# EAGLE board schematicamitfix_layout3 (EAGLE 8.6.1)
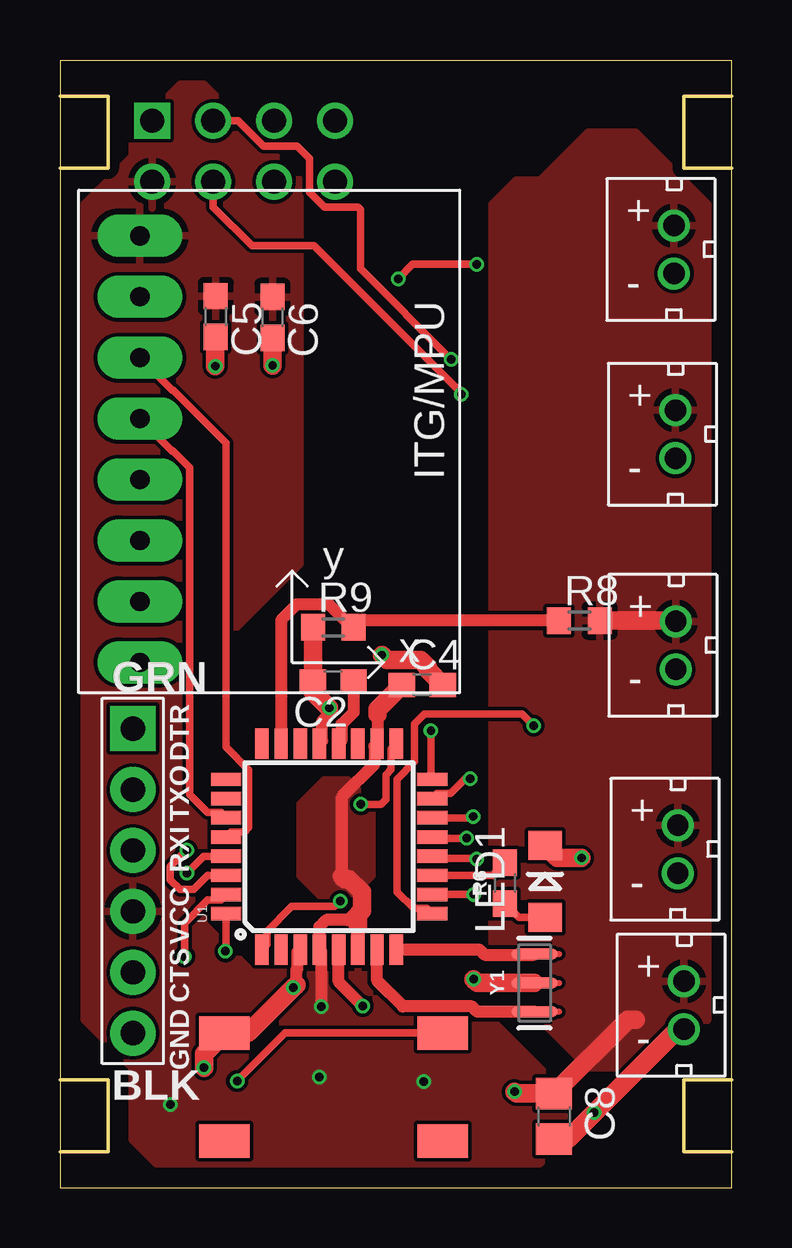
[diagram p0: board, top side]
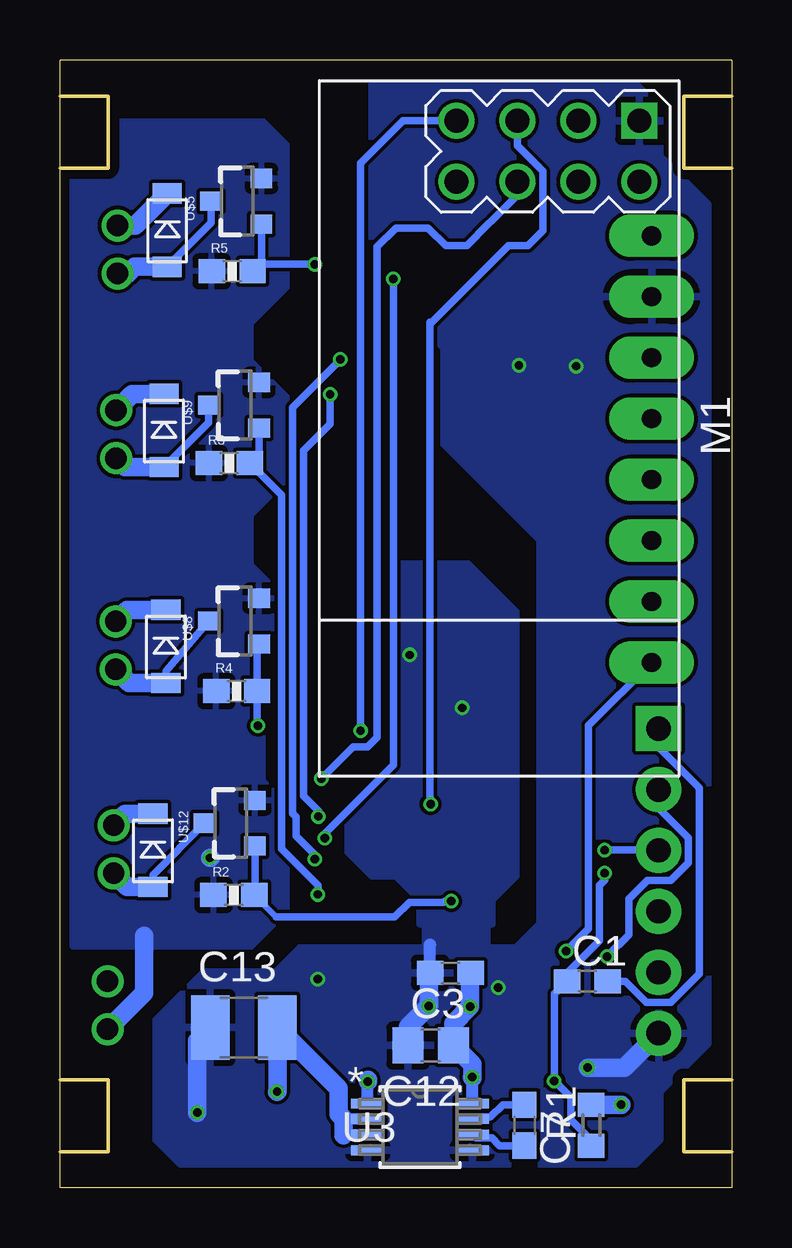
[diagram p1: board, bottom side, seen from below]

Size 28 x 47 mm. Coordinates in mm from the lower left corner, seen from the top.
Outline: 28,1.5 28,0 0,0 0,1.5
Outline: 28,1.5 28,4.5
Outline: 28,4.5 28,42.5
Outline: 28,42.5 28,45.5
Outline: 28,45.5 28,47 0,47 0,45.5
Outline: 0,45.5 0,42.5
Outline: 0,42.5 0,4.5
Outline: 0,4.5 0,1.5
Outline: 28,45.5 26,45.5 26,42.5 28,42.5
Outline: 28,1.5 26,1.5 26,4.5 28,4.5
Outline: 0,1.5 2,1.5 2,4.5 0,4.5
Outline: 0,45.5 2,45.5 2,42.5 0,42.5
Copper layers (1*16): Top 0.035559375mm / dielectric 1.6mm / Bottom 0.035559375mm
Design rules "oshpark-2layer-1": minimum track width 6mil, minimum drill 10mil, track to track 6mil, track to pad 6mil, pad to pad 6mil, via to via 6mil, smd to smd 6mil, copper to edge 15mil, drill to drill 6mil, minimum pad ring 5mil, minimum via ring 5mil, stop-mask expansion 2.5mil, vias tented up to drill 0mil, thermal gap 10mil

## Footprints (pad centres in the part's own frame; a part is rotated, then mirrored left to right if it is on the bottom)
C0603 = smd 1.1 x 1: 1 -0.85,0; 2 0.85,0
C0805 = smd 1.3 x 1.5: 1 -0.95,0; 2 0.95,0
C1210 = smd 1.6 x 2.7: 1 -1.4,0; 2 1.4,0
FTDI_DEVICE_SIDE = drill 1.016 pad 1.88 square: P$1 -6.35,0 | drill 1.016 pad 1.88: P$2 -3.81,0; P$3 -1.27,0; P$4 1.27,0; P$5 3.81,0; P$6 6.35,0
LED-1206 = smd 1.2 x 1.4: A -1.5,0; C 1.5,0
WIRELESS-NRF24L01 = drill 1 square: 1 -12.7,6.35 | drill 1: 2 -10.16,6.35; 3 -12.7,3.81; 4 -10.16,3.81; 5 -12.7,1.27; 6 -10.16,1.27; 7 -12.7,-1.27; 8 -10.16,-1.27
R0603 = smd 1 x 1.1: 1 -0.85,0; 2 0.85,0
0603-RES = smd 1.1 x 1: 1 -0.85,0; 2 0.85,0
0603 = smd 1.1 x 1: 1 -0.85,0; 2 0.85,0
TQFP32-08 = smd 1.27 x 0.559: 1 -4.293,2.8; 2 -4.293,2; 3 -4.293,1.2; 4 -4.293,0.4; 5 -4.293,-0.4; 6 -4.293,-1.2; 7 -4.293,-2; 8 -4.293,-2.8; 17 4.293,-2.8; 18 4.293,-2; 19 4.293,-1.2; 20 4.293,-0.4; 21 4.293,0.4; 22 4.293,1.2; 23 4.293,2; 24 4.293,2.8 | smd 0.559 x 1.27: 9 -2.8,-4.293; 10 -2,-4.293; 11 -1.2,-4.293; 12 -0.4,-4.293; 13 0.4,-4.293; 14 1.2,-4.293; 15 2,-4.293; 16 2.8,-4.293; 25 2.8,4.293; 26 2,4.293; 27 1.2,4.293; 28 0.4,4.293; 29 -0.4,4.293; 30 -1.2,4.293; 31 -2,4.293; 32 -2.8,4.293
GY-521 = drill 0.8 pad 1.778 long: ADO -8.89,-6.35; GND -8.89,6.35; INT -8.89,-8.89; SCL -8.89,3.81; SDA -8.89,1.27; VCC -8.89,8.89; XCL -8.89,-3.81; XDA -8.89,-1.27
21-0036K = smd 1.372 x 0.406: 1 -2.184,0.975; 2 -2.184,0.325; 3 -2.184,-0.325; 4 -2.184,-0.975; 5 2.184,-0.975; 6 2.184,-0.325; 7 2.184,0.325; 8 2.184,0.975
LL3301NF065QG = smd 2.1 x 1.4: 1 0,0; 2 0,-4.5; 3 9.1,0; 4 9.1,-4.5
JST_CONNECTOR_FEMALE = drill 0.889: + 0,1; - 0,-1
MINI2-F3-B = smd 1.22 x 0.85: NEG 0,1.55; POS 0,-1.5
SOT23-3 = smd 0.8 x 0.9: 1 -0.95,-1; 2 0.95,-1; 3 0,1.1
RESONATOR-SMD-3.2X1.3 = smd 0.45 x 1.905: 1 -1.2,0; 2 0,0; 3 1.2,0

## Placement (x,y rotation side)
C1  100nF  [C0603]  6.01,8.6 0 bottom
C2  100nF  [C0603]  11.39,21.1 180 top
C3  100nF  [C0603]  11.72,8.95 180 bottom
C4  100nF  [C0603]  15.1,20.95 0 top
C5  100nF  [C0603]  6.5,36.31 270 top
C6  10uF  [C0603]  8.86,36.27 270 top
C7  0.22uF  [C0603]  8.63,2.6 270 bottom
C8  1uF  [C0805]  20.6,2.97 270 top
C12  1uF  [C0805]  12.54,5.93 180 bottom
C13  100uF  [C1210]  20.33,6.67 0 bottom
J1  FTDI_DEVICE  [FTDI_DEVICE_SIDE]  3.04,12.78 270 top
LED1  [LED-1206]  20.23,12.76 90 top
M1  WIRELESS-NRF24L01  [WIRELESS-NRF24L01]  10.2,31.76 270 bottom
R1  10k  [R0603]  5.85,2.6 90 bottom
R2  10k  [0603-RES]  20.75,12.19 0 bottom
R3  10k  [0603-RES]  20.94,30.19 0 bottom
R4  10k  [0603-RES]  20.63,20.69 0 bottom
R5  10k  [0603-RES]  20.82,38.19 0 bottom
R6  220  [0603]  18.56,12.69 90 top
R8  10k  [R0603]  21.66,23.63 0 top
R9  10k  [R0603]  11.39,23.35 0 top
U1  ATMEGA328P_TQFP  [TQFP32-08]  11.22,14.21 90 top
U2  GY-521MPU6050  [GY-521]  12.22,30.78 0 top
U3  MAX1595EUA33+  [21-0036K]  12.99,2.53 0 bottom
U$1  LL3301NF065QG  [LL3301NF065QG]  6.86,6.44 0 top
U$3  JST_CONNECTOR_FEMALE  [JST_CONNECTOR_FEMALE]  25.66,31.4 0 top
U$4  DB2W40300L  [MINI2-F3-B]  23.66,31.53 0 bottom
U$5  N-CHANNEL-MOSFET-IRLML6244TRPBF  [SOT23-3]  20.6,41.11 90 bottom
U$6  DB2W40300L  [MINI2-F3-B]  24.12,14.03 0 bottom
U$7  JST_CONNECTOR_FEMALE  [JST_CONNECTOR_FEMALE]  25.76,14.1 0 top
U$8  N-CHANNEL-MOSFET-IRLML6244TRPBF  [SOT23-3]  20.7,23.61 90 bottom
U$9  N-CHANNEL-MOSFET-IRLML6244TRPBF  [SOT23-3]  20.7,32.61 90 bottom
U$10  DB2W40300L  [MINI2-F3-B]  23.58,22.53 0 bottom
U$11  JST_CONNECTOR_FEMALE  [JST_CONNECTOR_FEMALE]  25.68,22.6 0 top
U$12  N-CHANNEL-MOSFET-IRLML6244TRPBF  [SOT23-3]  20.87,15.19 90 bottom
U$14  DB2W40300L  [MINI2-F3-B]  23.53,39.88 0 bottom
U$15  JST_CONNECTOR_FEMALE  [JST_CONNECTOR_FEMALE]  25.6,39.1 0 top
U$19  JST_CONNECTOR_FEMALE  [JST_CONNECTOR_FEMALE]  26.02,7.6 0 top
Y1  8MHz  [RESONATOR-SMD-3.2X1.3]  19.79,8.53 90 top

## Library data of the parts
C1-C8 C12 C13 = rcl; SPICEPREFIX: C
J1 M1 U2 U$3 U$4 U$6 U$7 U$10 U$11 U$14 U$15 U$19 = quad
LED1 = LilyPad-Wearables
R1 R8 R9 = rcl; SPICEPREFIX: R
R2-R5 = SparkFun-Resistors
R6 = SparkFun-Resistors; PROD_ID: RES-07861
U1 = quad; PROD_ID: IC-09069
U3 = MAX1595EUA33+; MANUFACTURER_PART_NUMBER: MAX1595EUA33+; VENDOR: Maxim Integrated Products
U$1 = E-Switch
U$5 U$8 U$9 U$12 = quad; DATASHEET: http://www.mouser.com/ds/2/196/irlml6244pbf-936666.pdf; MOUSER: 942-IRLML6244TRPBF; URL: http://www.mouser.com/Search/ProductDetail.aspx?R=IRLML6244TRPBFvirtualkey57370000virtualkey942-IRLML6244TRPBF
Y1 = SparkFun-Clocks; PROD_ID: XTAL-08895

## Nets
AIN: R8.1 R9.2 U1.23
FTDI_DTR: C1.2 J1.P$1
FTDI_RX: J1.P$3 U1.30
FTDI_TX: J1.P$2 U1.31
GND: C2.2 C3.2 C4.2 C5.2 C6.2 C8.2 C12.2 C13.1 J1.P$6 LED1.C M1.1 R2.1 R3.1 R4.1 R5.1 R9.1 U1.3 U1.5 U1.21 U2.GND U3.4 U3.5 U$1.1 U$5.2 U$8.2 U$9.2 U$12.2 U$19.- Y1.2
IMU_INT: U1.32 U2.INT
IMU_SCL: U1.28 U2.SCL
IMU_SDA: U1.27 U2.SDA
N$1: C1.1 R1.1 U1.29 U$1.3
N$2: C2.1 U1.20
N$5: U$3.- U$4.POS U$9.3
N$6: C7.1 U3.7
N$7: R6.2 U1.11
N$9: U$6.POS U$7.- U$12.3
N$10: C7.2 U3.6
N$11: LED1.A R6.1
N$13: U$8.3 U$10.POS U$11.-
N$17: U$5.3 U$14.POS U$15.-
NRF_CE: M1.3 U1.12
NRF_CSN: M1.4 U1.14
NRF_MISO: M1.7 U1.16
NRF_MOSI: M1.6 U1.15
NRF_SCK: M1.5 U1.17
PWM1: R2.2 U1.1 U$12.1
PWM2: R3.2 U1.10 U$9.1
PWM3: R4.2 U1.9 U$8.1
PWM4: R5.2 U1.13 U$5.1
VCC: C3.1 C4.1 C5.1 C6.1 C12.1 J1.P$4 M1.2 R1.2 U1.4 U1.6 U1.18 U2.VCC U3.1 U3.8
VIN: C8.1 C13.2 R8.2 U3.2 U3.3 U$3.+ U$4.NEG U$6.NEG U$7.+ U$10.NEG U$11.+ U$14.NEG U$15.+ U$19.+
XTAL1: U1.7 Y1.1
XTAL2: U1.8 Y1.3

## Tracks (layer width: path | path; a pad name or v marks a point on that pad's centre or on a via)
AIN
  Top 0.508: 20.78,23.6 R8.1 12.52,23.63 R9.2 12.17,23.35 11.21,24.31 9.88,24.31 9.22,23.65 U1.23
FTDI_DTR
  Bottom 0.305: C1.2 4.43,8.6 3.56,7.72 2.52,7.72 1.34,8.91 1.34,16.65 3.04,18.35 J1.P$1
FTDI_RX  (via drill 0.35)
  Top 0.305: v5.29,14.07 4.6,13.38 4.6,12.82 5,12.42 5.57,12.42 6.16,13.01 U1.30
  Bottom 0.305: J1.P$3 3.04,14.04 3.07,14.07 v5.29,14.07
FTDI_TX  (via drill 0.35)
  Top 0.305: U1.31 6.71,11.99 6.17,11.99 5.19,11.02 v5.19,9.63
  Bottom 0.305: v5.19,9.63 4.29,10.53 4.29,12.03 3.5,12.8 2.52,12.8 1.79,13.53 1.79,14.57 3.04,15.81 J1.P$2
GND  (via drill 0.35)
  Top 0.508: v12.62,7.57 11.62,8.57 U1.5 | 9.86,8.46 9.86,9.06 9.91,9.11 9.91,9.8 U1.3 | U1.21 10.93,18.62 10.93,19.44 11.23,19.73 v11.23,19.99
  Top 0.762: C8.2 21.17,2.02 v22.28,3.12 25.75,6.6 U$19.- | 9.86,8.46 v9.73,8.33 7.84,6.44 U$1.1 6,5.58 v6,5 | v11.23,19.99 10.54,20.68 C2.2 R9.1 | LED1.C 20.75,13.74 v21.74,13.74 | C5.2 6.48,35.44 v6.48,34.24 | C6.2 8.86,34.27 v8.87,34.27 | v13.42,22.2 13.64,21.98 15.02,21.98 15.33,21.67 15.33,21.57 C4.2 | Y1.2 17.4,8.53 v17.25,8.69
  Bottom 0.508: C3.2 12.57,10.13
  Bottom 0.762: v22.28,3.12 22.28,6.12 C13.1 | C12.2 13.49,6.7 v12.62,7.57 12.62,8.9 C3.2 | 21.72,13.74 v21.74,13.74 | U$19.- 24.5,8.12 24.5,10.5 | v6,5 4.47,5 J1.P$6
  pour Bottom: 28,10.5 28,43.5 27,44.5 19.5,44.5 18.5,43.5 18.5,37.5 20,36 20,34.5 18.5,33 18.5,29.5 20,28 20,26 18.5,24.5 18.5,20 19.5,19 19.5,17 18.5,16 18.5,11.5 20,10 27.5,10
  pour Bottom: 10.31,12.14 10.31,9.91 12.65,9.91 12.65,12.14 12.62,12.17 10.31,12.17
  pour Bottom: 11,1 23,1 24,2 24,7 23,8 22,9 14,9 13,10 8,10 7,11 7,30 15,38 15,46 4,46 3,45 3,43 2,42 1,41 1,6 2,5 3,4 3,2 4,1
  pour Bottom: 13,10 18,10 19,9 14,9
  pour Bottom: 9,10 8,11 8,27 9,28 12,31 12,35 9,35 6,38 2,38 2,10
  pour Bottom: 10,25 11,26 15,26 16,25 16,14 15,13 14,13 13,12 13,11 10,11 10,12 9,13 9,24
IMU_INT  (via drill 0.35)
  Top 0.305: 6.53,11.41 U1.32 6.93,9.88 v6.9,9.85
  Bottom 0.305: U2.INT 5.97,19.25 5.97,10.78 v6.9,9.85
IMU_SCL
  Top 0.305: U2.SCL 4.68,33.24 4.71,33.24 6.93,31.03 6.93,18.36 7.87,17.42 7.87,15 7.69,14.83 7.14,14.83 U1.28
IMU_SDA
  Top 0.305: U1.27 6.71,15.63 6.17,15.63 5.41,16.38 5.41,30 4.71,30.7 4.68,30.7 U2.SDA
N$1  (via drill 0.35)
  Top 0.305: U1.29 6,13.81 v5.29,13.1 | U$1.3 9.39,6.44 v7.39,4.44
  Bottom 0.305: R1.1 5.85,1.97 6.71,2.82 6.71,3.75 v7.39,4.44 7.39,8.07 C1.1 6.86,8.92 5.51,10.27 5.51,12.59 5.29,12.81 v5.29,13.1
N$2
  Top 0.508: U1.20 11.73,18.62 11.73,19.31 12.24,19.81 C2.1
N$5
  Bottom 0.305: U$9.3 21.8,31.89 U$4.POS
  Bottom 0.762: U$4.POS 25.29,30.03 U$3.-
N$6
  Bottom 0.305: U3.7 10.71,2.95 10.04,2.95 9.54,3.45 C7.1
N$7
  Top 0.305: U1.11 18.03,13.01 R6.2
N$9
  Bottom 0.305: U$12.3 24.12,13.04 U$6.POS
  Bottom 0.762: U$6.POS 25.19,12.53 U$7.-
N$10
  Bottom 0.305: U3.6 10.66,2.06 9.99,2.06 9.68,1.75 C7.2
N$11
  Top 0.305: LED1.A 19.14,11.26 R6.1
N$13
  Bottom 0.305: U$8.3 23.58,21.53 U$10.POS
  Bottom 0.762: U$10.POS 25.11,21.03 U$11.-
N$17
  Bottom 0.305: U$5.3 21.7,40.21 U$14.POS
  Bottom 0.762: U$14.POS 24.88,38.38 25.16,38.1 U$15.-
NRF_CE  (via drill 0.35)
  Top 0.305: 16.31,34.54 v16.31,34.52 12.53,38.3 12.53,40.76 12.43,40.86 11.03,40.86 10.41,41.48 10.41,42.88 9.89,43.4 8.49,43.4 7.43,44.46 M1.3 | U1.12 15.61,13.72 17.35,13.72 v17.37,13.69
  Bottom 0.305: v16.31,34.52 18.31,32.52 18.31,15.59 18.16,15.44 18.16,14.66 17.37,13.87 v17.37,13.69
NRF_CSN  (via drill 0.35)
  Top 0.305: v16.74,33.07 16.76,33.1 10.6,39.26 8,39.26 6.39,40.87 M1.4 | v17.22,15.47 17.16,15.41 U1.14
  Bottom 0.305: v16.74,33.07 16.74,31.82 17.85,30.71 17.85,16.33 17.22,15.7 v17.22,15.47
NRF_MISO  (via drill 0.35)
  Top 0.305: v15.47,19.05 15.47,17.05 U1.16
  Bottom 0.305: 15.47,19 v15.47,19.05 15.47,42.7 13.71,44.46 M1.7
NRF_MOSI  (via drill 0.35)
  Top 0.305: U1.15 15.73,16.43 16.27,16.43 16.9,17.05 v17.1,17.05
  Bottom 0.305: v17.1,17.05 15.78,18.37 15.19,18.37 14.79,18.77 14.79,39.21 14,40 12.65,40 11.91,39.26 11.03,39.26 10.15,40.15 9.97,40.32 8.93,41.36 M1.6
NRF_SCK  (via drill 0.35)
  Top 0.305: U1.17 13.8,18.29 13.8,17.42 13.59,17.21 13.59,16.18 13.39,15.98 v12.55,15.98
  Bottom 0.305: 12.57,36.07 12.57,36 | 12.57,36 12.57,15.98 v12.55,15.98 | 12.57,36 9.31,39.26 8.49,39.26 7.87,39.88 7.87,42.36 8.93,43.42 M1.5
PWM1  (via drill 0.35)
  Top 0.305: U1.1 8.64,10.13 8.64,10.68 9.67,11.71 11.46,11.71 v11.68,11.94
  Bottom 0.254: R2.2 18.99,11.28
  Bottom 0.305: U$12.1 19.87,12.22 R2.2 | 18.99,11.28 14.05,11.28 13.44,11.89 12.01,11.89 11.97,11.94 v11.68,11.94
PWM2  (via drill 0.35)
  Top 0.305: U1.10 v17.24,12.21 v17.25,12.22 17.27,12.24
  Bottom 0.305: U$9.1 19.7,30.58 R3.2 18.77,28.87 18.77,14.12 17.25,12.6 v17.25,12.22
PWM3  (via drill 0.35)
  Top 0.305: U1.9 15.3,11.63 14.75,11.63 14.05,12.33 14.05,17.02 14.79,17.76 14.79,19.33 15.19,19.74 19.26,19.74 v19.75,19.25
  Bottom 0.305: U$8.1 19.78,22.28 R4.2 | R4.2 19.78,20.52 19.8,20.5 | v19.75,19.25 19.78,19.28 R4.2
PWM4  (via drill 0.35)
  Top 0.305: U1.13 15.56,14.56 v16.95,14.56 | v14.1,37.87 14.71,38.48 v17.37,38.48 17.42,38.48
  Bottom 0.305: U$5.1 19.6,38.56 R5.2 19.68,38.48 v17.37,38.48 | v16.95,14.56 16.95,14.77 14.1,17.62 14.1,37.8 14.17,37.87 v14.1,37.87
VCC  (via drill 0.35)
  Top 0.508: v10.9,7.54 10.9,9.84 U1.4 10.82,10.87 11.1,11.15 12.01,11.15 | 12.01,11.15 12.09,11.15 12.42,10.82 U1.6 | 13.23,19.71 13.23,18.52 U1.18 13.11,18.39 13.11,17.64 11.76,16.3 11.76,12.97 12.47,12.26 12.47,11.61 12.01,11.15
  Top 0.762: C4.1 13.23,19.93 13.23,19.71 | 12.42,10.82 12.42,11.38 12.6,11.56 12.6,12.31 12.06,12.85 11.88,12.85 11.76,12.97
  Bottom 0.508: v10.82,4.6 10.82,3.52 U3.8 | U3.1 15.17,4.49 15.16,4.5
  Bottom 0.762: C3.1 10.9,8.92 v10.9,7.54 11.59,6.85 C12.1 10.81,5.14 10.81,4.58 v10.82,4.6 | 15.16,4.5 v15.16,4.42 | R1.2 v4.6,3.45
  pour Top: 12,17 11,17 10,16 10,13 11,12 12,12 13,13 13,16
  pour Top: 1,41 3,43 3,44 5,46 6,46 7,45 10,42 10,26 6,22 6,11 8,9 17,9 18,8 18,7 21,4 21,2 20,1 4,1 3,2 3,5 2,6 1,7
VIN  (via drill 0.35)
  Top 0.762: R8.2 25.65,23.63 U$11.+ | 24,7 23.68,7 C8.1 19.03,3.92 v18.95,4
  Bottom 0.483: 16.16,2.85 16.15,2.85 U3.2 | 16.19,2.19 16.17,2.21 U3.3
  Bottom 0.508: 16.39,3.08 16.16,2.85
  Bottom 0.762: U$4.NEG 24.98,33.08 U$3.+ | U$10.NEG 25.2,24.08 U$11.+ | U$6.NEG 25.28,15.58 U$7.+ | 16.19,2.19 16.19,2.87 16.39,3.08 16.39,4.13 C13.2 18.93,4.02 v18.95,4 | U$14.NEG 24.86,40.1 U$15.+
  pour Top: 21,43 22,44 24,44 25,43 27,41 27,7 25,5 22,5 21,6 20,7 18,9 18,41 19,42 20,42
XTAL1
  Top 0.508: 13.22,8.62 U1.7 | 13.22,8.62 13.31,8.53 | Y1.1 17.39,7.33 17.18,7.55 14.3,7.55 13.22,8.62
XTAL2
  Top 0.508: U1.8 17.49,9.92 17.7,9.7 19.76,9.7 Y1.3